# EAGLE board power_board (EAGLE 9.6.2)
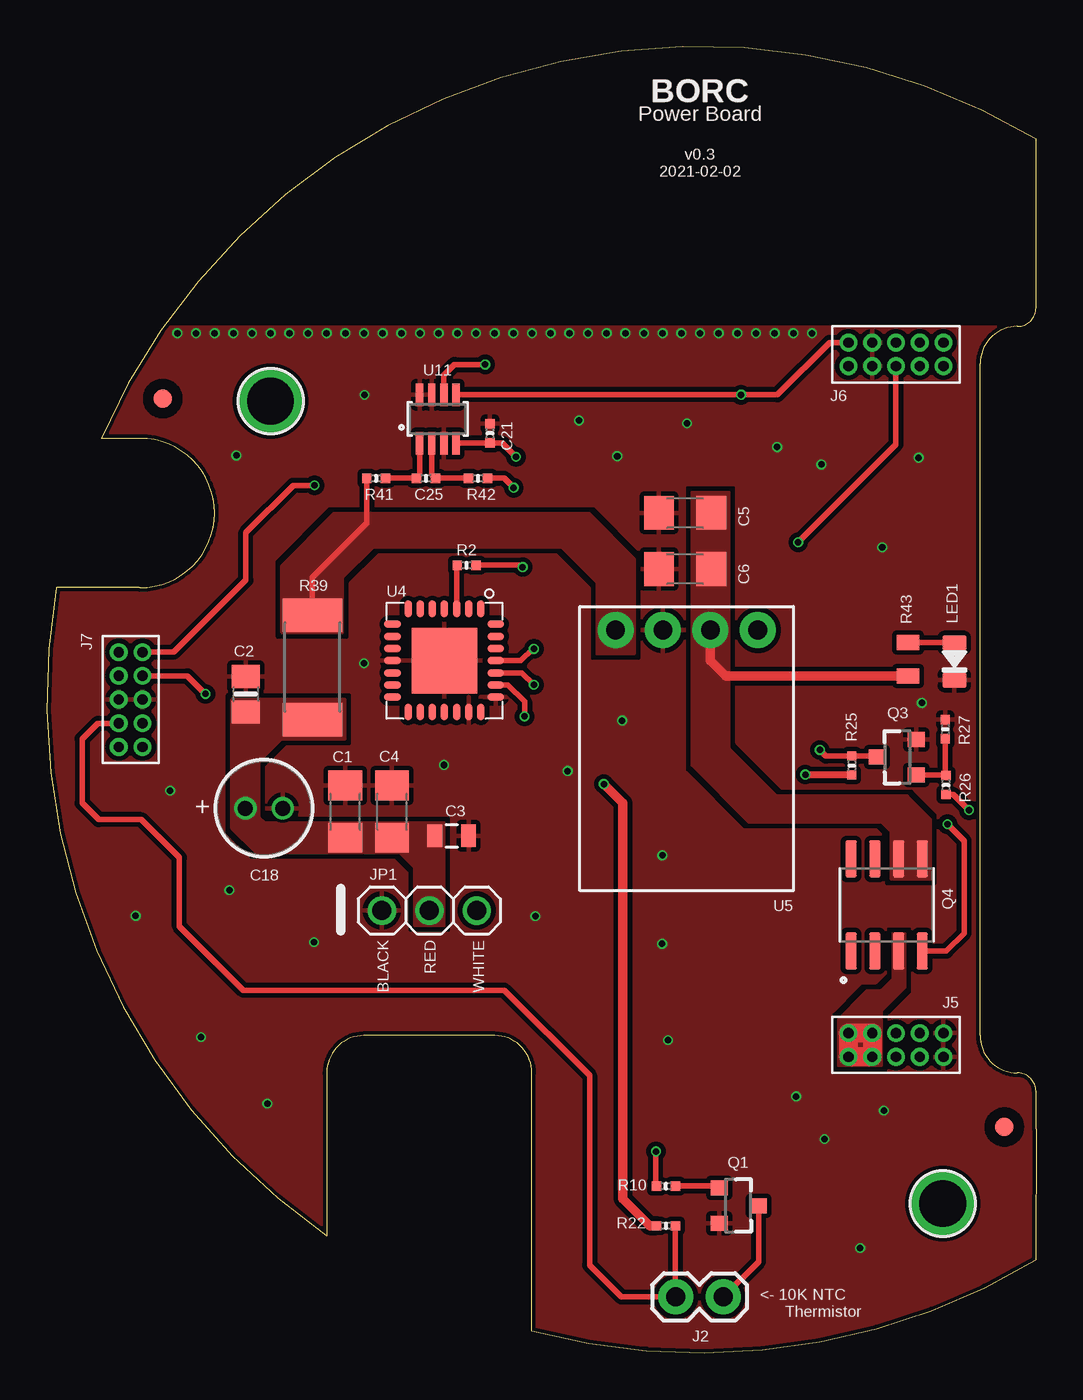
[diagram p0: board, top side]
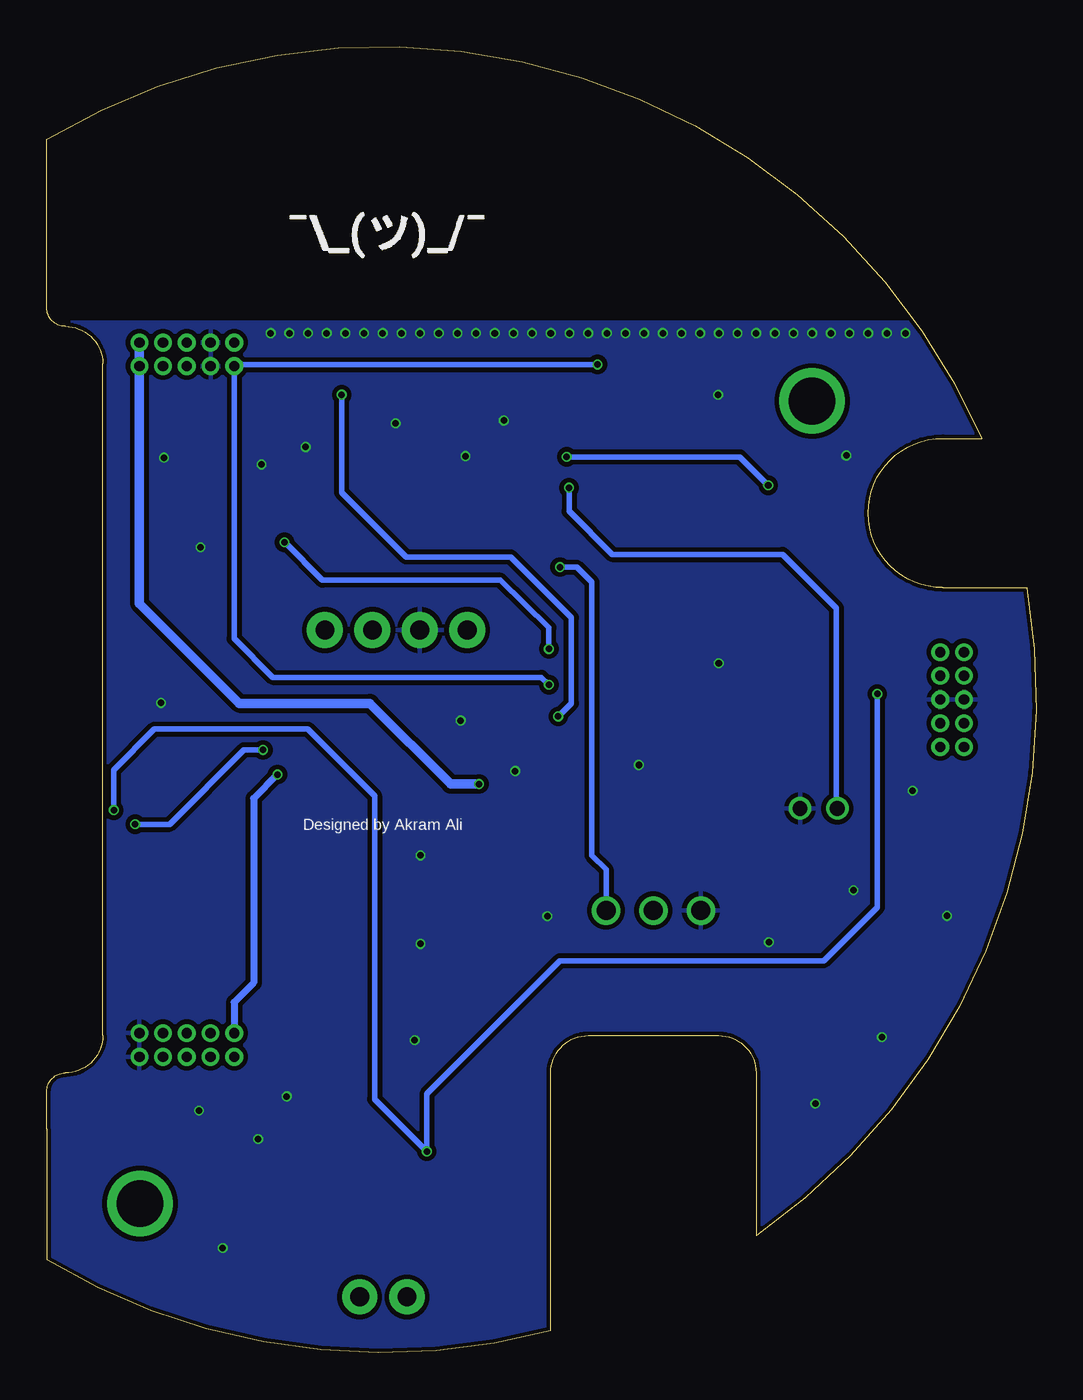
[diagram p1: board, bottom side, seen from below]

Size 53 x 69.99 mm. Coordinates in mm from the lower left corner, seen from the top.
Outline: 53,14 arc90 52,15 arc-90 50,17 50,53 arc-90 52,55 arc90 53,56 53,65.02 arc97 2.92,49 5,49 arc-180 5,41 0.51,41 arc65 15,6.28 15,15 arc-90 17,17 24,17 arc-90 26,15 26,1.18 arc46 52.98,4.97 53,12 53,14
Copper layers (1*16): Top 0.035559375mm / dielectric 1.6mm / Bottom 0.035559375mm
Design rules "jlcpcb2layer": minimum track width 5mil, minimum drill 12mil, track to track 5mil, track to pad 5mil, pad to pad 5mil, via to via 5mil, smd to smd 5mil, copper to edge 8mil, drill to drill 6mil, minimum pad ring 5mil, minimum via ring 3mil, stop-mask expansion 2.5mil, vias tented up to drill 0mil, thermal gap 10mil
Net classes: 0 default: width 0.152 mm, drill 0.305 mm, clearance 0.152 mm; 1 power: width 0.381 mm, clearance 0.254 mm

## Footprints (pad centres in the part's own frame; a part is rotated, then mirrored left to right if it is on the bottom)
1206 = smd 1.6 x 1.8: 1 -1.4,0; 2 1.4,0
0805-NO = smd 1.24 x 1.5: 1 -0.95,0; 2 0.95,0
0805 = smd 0.8 x 1.2: 1 -0.9,0; 2 0.9,0
WCAP-ATLL_5X11(DXL) = drill 0.8: 1 1,0; 2 -1,0
MICROBUILDER__0402MP = smd 0.5 x 0.5: 1 -0.508,0; 2 0.508,0
1X02 = drill 1.016 pad 1.88: 1 0,0; 2 2.54,0
HEADER_1.27MM_2X5 = drill 0.55 pad 0.95: 1 0.865,0.865; 2 2.135,0.865; 3 0.865,2.135; 4 2.135,2.135; 5 0.865,3.405; 6 2.135,3.405; 7 0.865,4.675; 8 2.135,4.675; 9 0.865,5.945; 10 2.135,5.945
1X03 = drill 1.016: 1 -2.54,0; 2 0,0; 3 2.54,0
0805-LED = smd 0.8 x 1.3: MINUS -1,0; PLUS 1,0
SOT23-3 = smd 0.8 x 0.9: 1 -0.95,-1; 2 0.95,-1; 3 0,1.1
SOIC-8 = smd 1.97 x 0.6: 1 -2.47,1.905; 2 -2.47,0.635; 3 -2.47,-0.635; 4 -2.47,-1.905; 5 2.47,-1.905; 6 2.47,-0.635; 7 2.47,0.635; 8 2.47,1.905
2512 = smd 1.8 x 3.2: 1 -2.8,0; 2 2.8,0
HVQFN28_SOT788-1 = smd 0.9 x 0.4: 1 1.035,5.76; 2 1.035,5.11; 3 1.035,4.46; 4 1.035,3.81; 5 1.035,3.16; 6 1.035,2.51; 7 1.035,1.86; 15 6.56,1.86; 16 6.56,2.51; 17 6.56,3.16; 18 6.56,3.81; 19 6.56,4.46; 20 6.56,5.11; 21 6.56,5.76 | smd 0.4 x 0.9: 8 1.86,1.035; 9 2.51,1.035; 10 3.16,1.035; 11 3.81,1.035; 12 4.46,1.035; 13 5.11,1.035; 14 5.76,1.035; 22 5.76,6.56; 23 5.11,6.56; 24 4.46,6.56; 25 3.81,6.56; 26 3.16,6.56; 27 2.51,6.56; 28 1.86,6.56 | smd 3.5 x 3.5: TH 3.81,3.81
POLOLU_STEPUP_U1V11X = drill 1 pad 1.93: EN 1.905,1.27; GND 6.985,1.27; VIN 4.445,1.27; VOUT 9.525,1.27
SOT23-8 = smd 0.4 x 1.2: 1 -0.975,-1.3; 2 -0.325,-1.3; 3 0.325,-1.3; 4 0.975,-1.3; 5 0.975,1.3; 6 0.325,1.3; 7 -0.325,1.3; 8 -0.975,1.3
MOUNTINGHOLE_2.5_PLATED = drill 2.5 pad 3.2: P$1 0,0
FIDUCIAL_1MM = smd 1 x 1: 1 0,0

## Placement (x,y rotation side)
C1  2.2uF  [1206]  16,29 90 top
C2  0.1uF/50V  [0805-NO]  10.68,35.29 90 top
C3  10uF  [0805]  21.7,27.7 0 top
C4  2.2uF  [1206]  18.5,29 90 top
C5  10uF  [1206]  34.2,45 180 top
C6  10uF  [1206]  34.2,42 180 top
C18  22uF  [WCAP-ATLL_5X11(DXL)]  11.64,29.18 180 top
C21  0.1uF  [MICROBUILDER__0402MP]  23.74,49.28 270 top
C25  0.1uF  [MICROBUILDER__0402MP]  20.32,46.86 0 top
J2  [1X02]  33.7,3 0 top
J5  20021311-00010T4LF  [HEADER_1.27MM_2X5]  48.9,15 90 top
J6  20021311-00010T4LF  [HEADER_1.27MM_2X5]  48.9,52 90 top
J7  20021311-00010T4LF  [HEADER_1.27MM_2X5]  3,31.6 0 top
JP1  [1X03]  20.5,23.7 0 top
LED1  BLUE  [0805-LED]  48.62,37.04 90 top
Q1  600mA/40V  [SOT23-3]  37.03,7.89 270 top
Q3  600mA/40V  [SOT23-3]  45.58,31.92 90 top
Q4  NTMD4184PFR2G  [SOIC-8]  45,24 90 top
R2  220  [MICROBUILDER__0402MP]  22.5,42.2 180 top
R10  330  [MICROBUILDER__0402MP]  33.17,8.94 180 top
R22  10K 0.1%  [MICROBUILDER__0402MP]  33.17,6.81 0 top
R25  10K  [MICROBUILDER__0402MP]  43.12,31.47 90 top
R26  1K  [MICROBUILDER__0402MP]  48.17,30.43 270 top
R27  10K  [MICROBUILDER__0402MP]  48.13,33.42 90 top
R39  0.1/1%/2W  [2512]  14.23,36.73 90 top
R41  10  [MICROBUILDER__0402MP]  17.65,46.86 0 top
R42  10  [MICROBUILDER__0402MP]  23.11,46.86 180 top
R43  10K  [0805]  46.12,37.17 270 top
U4  [HVQFN28_SOT788-1]  17.5,40.9 270 top
U5  POLOLU_STEPUP_U1V11X  [POLOLU_STEPUP_U1V11X]  40,40 180 top
U11  INA219AIDCNR  [SOT23-8]  20.95,50.04 0 top
U$2  MOUNTINGHOLE2.5  [MOUNTINGHOLE_2.5_PLATED]  12,51 0 top
U$3  MOUNTINGHOLE2.5  [MOUNTINGHOLE_2.5_PLATED]  48,8 0 top
U$8  FIDUCIAL  [FIDUCIAL_1MM]  51.3,12.1 0 top
U$9  FIDUCIAL  [FIDUCIAL_1MM]  6.21,51.13 0 top

## Library data of the parts
C1 C3-C6 = SparkFun-Passives
C2 = microbuilder
C18 = 860160672011_Eagle_WCAP-ATLL_rev20a; DATASHEET-URL: https://www.we-online.com/catalog/datasheet/860160672011.pdf; DF: 10%; DIAMETER: 5mm; I-LEAK: 11uA; I-RIPPLE: 162mA; L: 11mm; MPN: 860160672011; OPERATING-TEMPERATURE: -55 °C up to +105 °C; PART-NUMBER: 860160672011; PITCH: 2mm; TECHNICAL-REFERENCE: ATEC110220M050DSPA3C000; VR: 50V(DC)
C21 C25 = Adafruit Feather 32u4 Bluefruit LE; MPN: GRM155R71C104KA88J
J2 = SparkFun-Connectors
J5-J7 = Amphenol
JP1 U$8 U$9 = adafruit
LED1 = LowPowerLab; MPN: 150080BS75000
Q1 Q3 = SparkFun-DiscreteSemi; MPN: MMBT3904-TP; PROD_ID: TRANS-08049
Q4 = NTMD4184PFR2G; MPN: NTMD4184PFR2G
R2 = Adafruit Feather 32u4 Bluefruit LE; MPN: RC0402JR-071KL
R10 = Adafruit Feather 32u4 Bluefruit LE; MPN: RC0402JR-0710KL
R22 = Adafruit Feather 32u4 Bluefruit LE; MPN: RC0402JR-0727RL
R25 R27 = Adafruit Feather 32u4 Bluefruit LE; MPN: RC0402FR-7W10KL
R26 = Adafruit Feather 32u4 Bluefruit LE; MPN: RC0402FR-101KL
R39 = microbuilder; MPN: RCWE2512R100FKEA
R41 R42 = Adafruit Feather 32u4 Bluefruit LE; MPN: RC0402FR-0710RL
R43 = SparkFun-Resistors; MPN: RK73B2ATTD103J
U4 = PCA9685
U5 = Pololu Step Up Vregs
U11 = microbuilder; MPN: INA219AIDCNR
U$2 U$3 = ADS1x15

## Nets
5V: R39.2 R41.1 U5.VOUT
5V_POWER: C1.1 C2.1 C3.1 C4.1 C18.1 JP1.2 R39.1 R42.1
CH0: JP1.3 R2.1
CURRENT_SENSE_POWER: C21.2 J7.10 U11.4
DRIVER_CONTROL: J6.5 U4.25
GND [power]: C1.2 C2.2 C3.2 C4.2 C5.2 C6.2 C18.2 C21.1 J5.1 J5.2 J6.7 J6.8 J7.5 J7.6 JP1.1 LED1.MINUS Q1.2 Q3.2 R27.2 U4.11 U4.20 U4.22 U4.TH U5.GND U11.3 U11.7 U11.8
GND0: J2.2 Q1.3
MOTOR_CONTROL: J7.8 R10.2 R26.2
N$7: Q1.1 R10.1
N$9: R2.2 U4.3
N$11: LED1.PLUS R43.1
N$32: Q3.3 Q4.4 R25.2
N$33: Q3.1 R26.1 R27.1
SCL: J6.10 U4.23 U11.5
SDA: J6.9 U4.24 U11.6
TEMP: J2.1 J7.3 R22.2
VBAT: J5.7 J5.8 J5.9 J5.10 Q4.3 R25.1
VBAT_ON [power]: C5.1 C6.1 Q4.5 Q4.6 R43.2 U5.VIN
VCC: J6.1 J6.2 R22.1
VIN+: C25.1 R41.2 U11.1
VIN-: C25.2 R42.2 U11.2

## Tracks (layer width: path | path; a pad name or v marks a point on that pad's centre or on a via)
5V
  Top 0.305: R41.1 17.14,44.45 14.23,41.54 R39.2
  pour Top (no thermals): 12.57,38.61 15.87,38.61 15.87,41.53 17.52,43.18 27.55,43.18 29.46,41.27 29.46,37.46 31.49,37.46 31.49,42.54 29.08,44.96 15.36,44.96 12.57,42.16
5V_POWER  (via drill 0.35)
  Top 0.305: R42.1 24.51,46.86 v25.01,46.35
  Bottom 0.305: v25.01,46.35 25.01,45.09 22.71,42.79 13.58,42.79 10.7,39.9 10.7,29.23 C18.1
  pour Top (no thermals): 9.9,35 9.9,28.1 11.2,26.8 18.9,26.8 19.7,26 19.7,22.9 21.3,22.9 21.3,28.4 11.7,28.4 11.4,28.7 11.4,31.7 12.6,32.9 16,32.9 16,35
CH0  (via drill 0.35)
  Top 0.305: R2.1 25.4,42.2 v25.5,42.1
  Bottom 0.305: v25.5,42.1 24.61,42.1 23.8,41.29 23.8,26.66 23.04,25.9 JP1.3
CURRENT_SENSE_POWER  (via drill 0.35)
  Top 0.305: C21.2 23.71,48.74 | 23.71,48.74 U11.4 | v25.14,48.01 24.41,48.74 23.71,48.74 | J7.10 6.81,37.54 10.66,41.4 10.66,43.94 13.2,46.48 v14.35,46.48
  Bottom 0.305: v14.35,46.48 15.87,48.01 v25.14,48.01
DRIVER_CONTROL  (via drill 0.35)
  Top 0.305: J6.5 45.49,48.67 v40.25,43.43 | U4.25 25.4,37.09 26.03,37.72 v26.1,37.72
  Bottom 0.305: v26.1,37.72 26.1,38.85 28.7,41.4 38.22,41.4 v40.25,43.43
GND  (via drill 0.35)
  other vias: 24,54.63 25,54.63 27,54.63 28,54.63 29,54.63 30,54.63 23,54.63 22,54.63 20,54.63 19,54.63 18,54.63 17,54.63 15,54.63 14,54.63 12,54.63 11,54.63 10,54.63 9,54.63 8,54.63 41,54.63 32,54.63 33,54.63 34,54.63 36,54.63 37,54.63 38,54.63 39,54.63 13,54.63 7,54.63 16,54.63 21,54.63 26,54.63 31,54.63 35,54.63 40,54.63 6.61,30.12 11.82,13.36 8.27,16.92 14.32,22 9.78,24.79 27.9,31.17 30.82,33.88 30.56,48.04 39.13,48.54 28.51,49.95 34.3,49.81 46.71,47.97 41.49,47.6 4.77,23.41 44.76,43.16 46.87,34.82 32.97,21.91 33.28,16.76 32.98,26.66 44.84,12.98 41.67,11.45 43.57,5.61 40.14,13.74 17.03,51.33 21.28,31.5 17,36.95 10.16,48.08 26.18,23.4
  pour Top (rank 6): -1,-1 -1,54.98 55,54.98 55,-1
  pour Bottom (rank 6): -2,-2 -2,55.22 56,55.22 56,-2
GND0
  Top 0.305: J2.2 38.13,4.89 Q1.3
MOTOR_CONTROL  (via drill 0.35)
  Top 0.305: R26.2 48.56,29.92 v49.4,29.08 | J7.8 7.54,36.27 v8.5,35.31 | R10.2 32.63,8.96 v32.63,10.79
  Bottom 0.305: v49.4,29.08 49.4,31.24 47.22,33.42 39,33.42 35.43,29.84 35.43,13.59 v32.63,10.79 32.63,13.87 25.51,21 11.38,21 8.5,23.88 v8.5,35.31
N$7
  Top 0.305: R10.1 35.93,8.94 Q1.1
N$9
  Top 0.305: U4.3 21.96,42.17 R2.2
N$11
  Top 0.305: R43.1 48.59,38.07 LED1.PLUS
N$32  (via drill 0.35)
  Top 0.305: Q4.4 48.19,21.53 49.14,22.48 49.14,27.43 v48.26,28.32 | v41.41,32.31 41.74,31.98 R25.2 44.42,31.98 Q3.3
  Bottom 0.305: v48.26,28.32 46.41,28.32 42.43,32.31 v41.41,32.31
N$33
  Top 0.305: Q3.1 48.13,30.97 R26.1 48.13,30.97 R27.1
SCL  (via drill 0.35)
  Top 0.305: J6.10 41.94,54.13 39.14,51.34 v37.2,51.34 U11.5 | U4.23 24.71,35.79 25.6,34.9 v25.6,34.1
  Bottom 0.305: v25.6,34.1 24.9,34.8 24.9,39.4 28.14,42.64 33.74,42.64 37.2,46.1 v37.2,51.34
SDA  (via drill 0.35)
  Top 0.305: U11.6 21.28,52.39 21.84,52.96 v23.49,52.96 | v26.1,35.8 25.46,36.44 U4.24
  Bottom 0.305: v23.49,52.96 42.79,52.96 42.92,52.83 J6.9 42.95,38.26 40.88,36.2 26.49,36.2 v26.1,35.8
TEMP
  Top 0.305: J7.3 2.74,33.73 1.9,32.89 1.9,29.46 2.79,28.57 5.08,28.57 7.11,26.54 7.11,22.86 10.54,19.43 24.51,19.43 29.08,14.86 29.08,4.7 30.78,3 J2.1 33.68,3.02 R22.2
VBAT  (via drill 0.35)
  Top 0.381: R25.1 40.66,30.96 v40.64,30.99
  Top 1.016: J5.10 J5.8 J5.7 J5.9 J5.10
  Bottom 0.381: v40.64,30.99 41.91,29.72 41.91,19.83 42.95,18.79 J5.10
  pour Top (no thermals): 45.33,22.48 45.97,22.48 45.97,19.56 44.7,18.29 44.7,15.37 42.41,15.37 42.41,17.91 43.81,19.3 43.94,19.43 44.7,19.43 45.33,20.07
VBAT_ON
  Top 0.508: U5.VIN 35.55,37.09 36.37,36.27 R43.2
  pour Top (no thermals): 45.21,25.4 47.37,25.4 47.37,28.57 46.1,29.84 39.11,29.84 36.57,32.38 36.57,46.1 34.54,46.1 34.54,31.5 37.59,28.45 44.7,28.45 45.21,27.94
VCC  (via drill 0.35)
  Top 0.508: R22.1 32.3,6.81 30.86,8.25 30.86,29.46 v29.84,30.48
  Bottom 0.508: J6.2 J6.1 48.03,40.16 42.67,34.8 35.68,34.8 31.36,30.48 v29.84,30.48
VIN+
  Top 0.305: U11.1 19.98,47.03 C25.1 R41.2
VIN-
  Top 0.305: U11.2 20.63,47.06 C25.2 R42.2

## Text on the board
tPlace: BORC | Power Board | v0.3 / 2021-02-02 | BLACK | RED | WHITE | <- 10K NTC / Thermistor
bPlace: Designed by Akram Ali